# Altium PCB SW 12.PcbDoc
Units mil, origin at the board's own origin, x right, y up, seen from the top; angles counter-clockwise.
Board outline 2757.3 x 2760 mil, 2 copper layers (Top Layer, Bottom Layer); 42 components, 18 nets, 106 pads, 850 vias.
Unrouted connection lines stored in the file: 1.
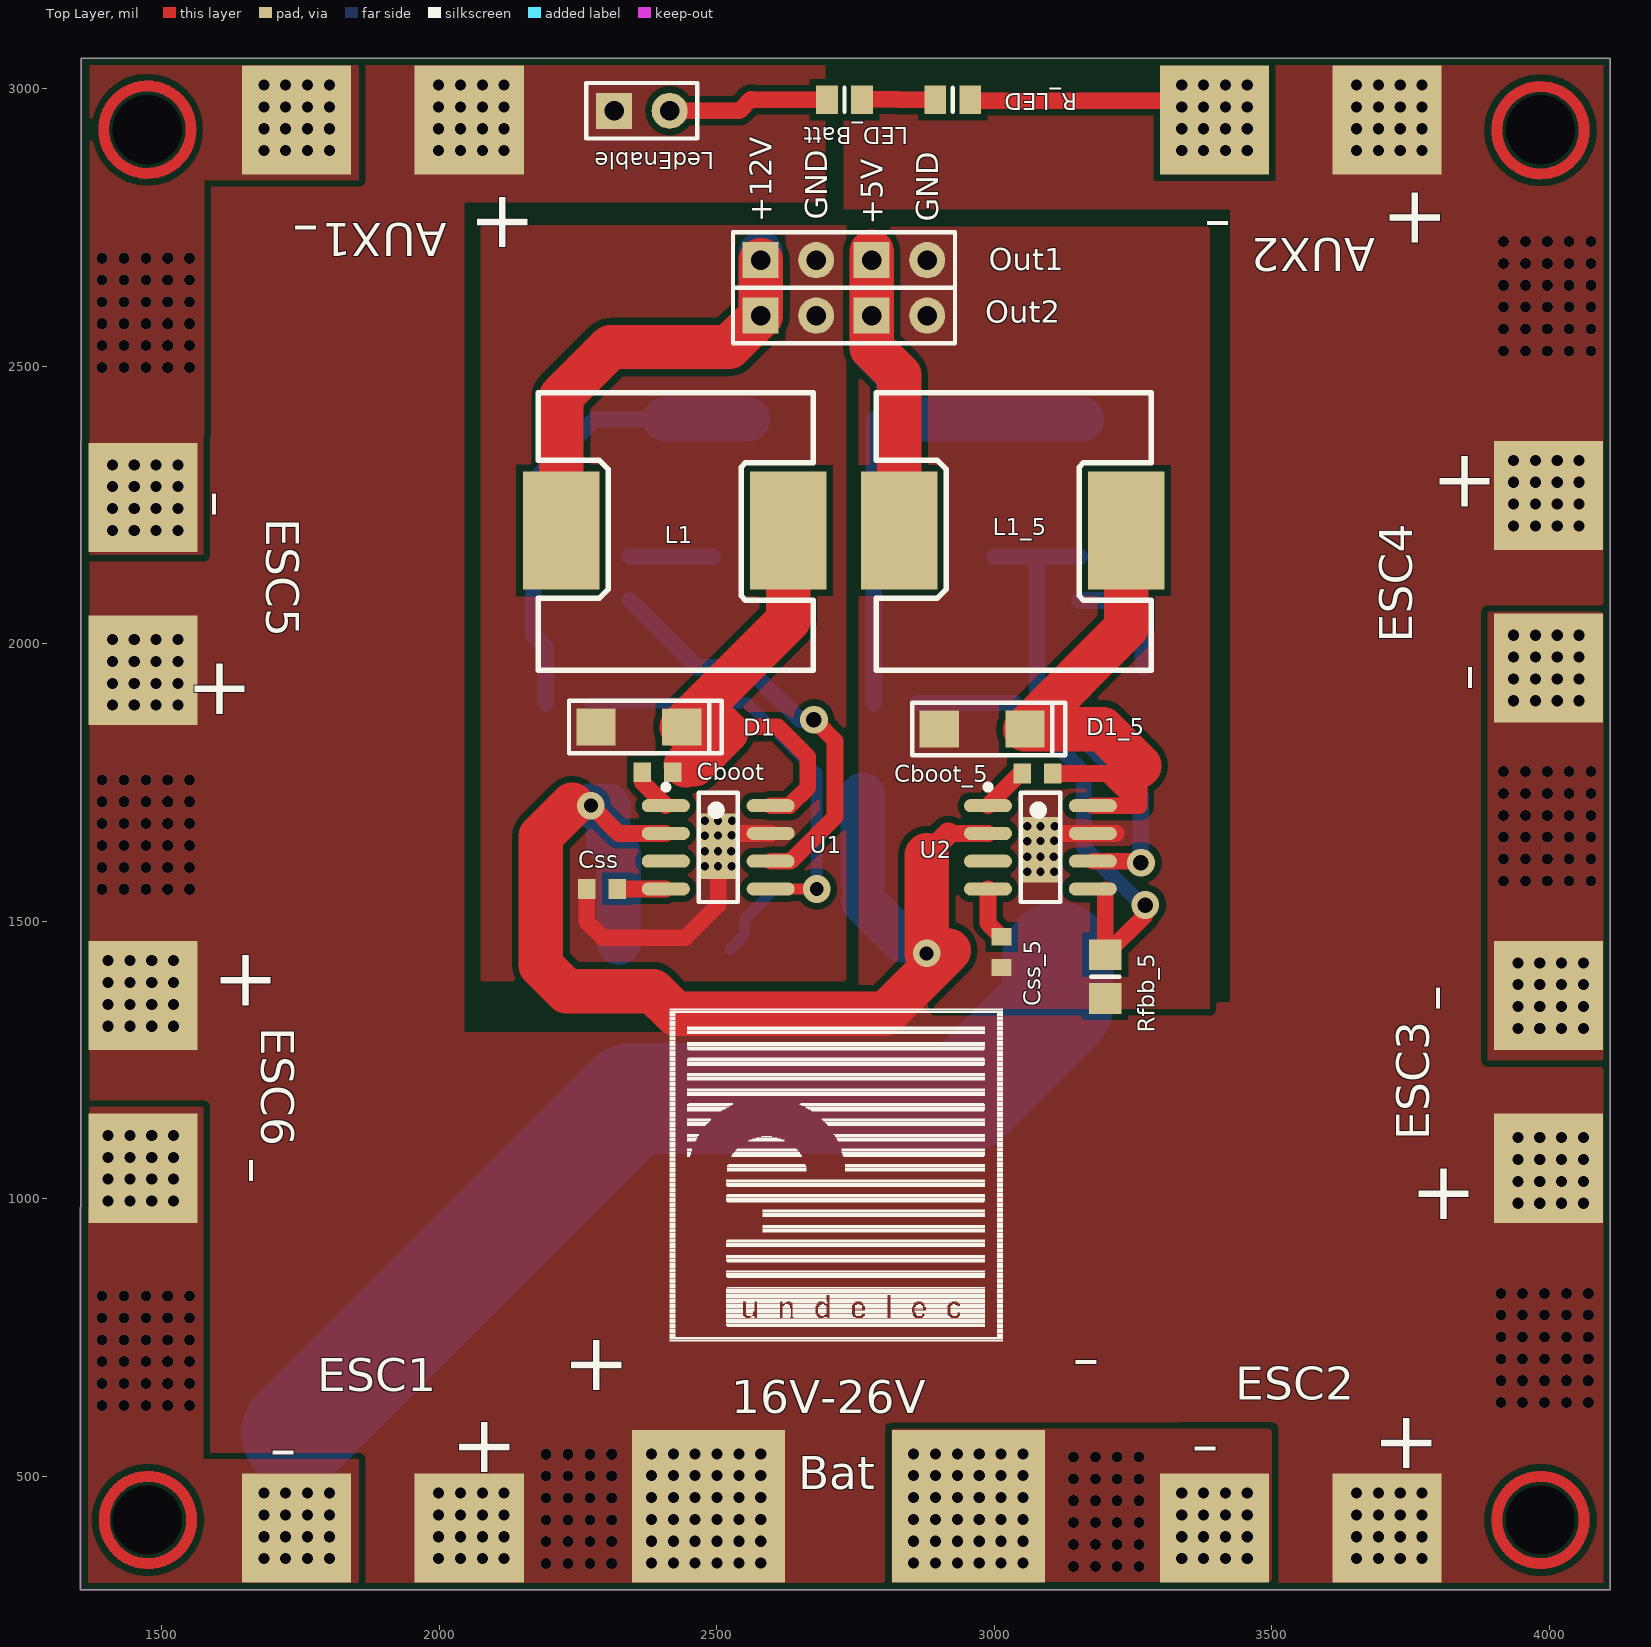
[diagram p0: Top Layer view]
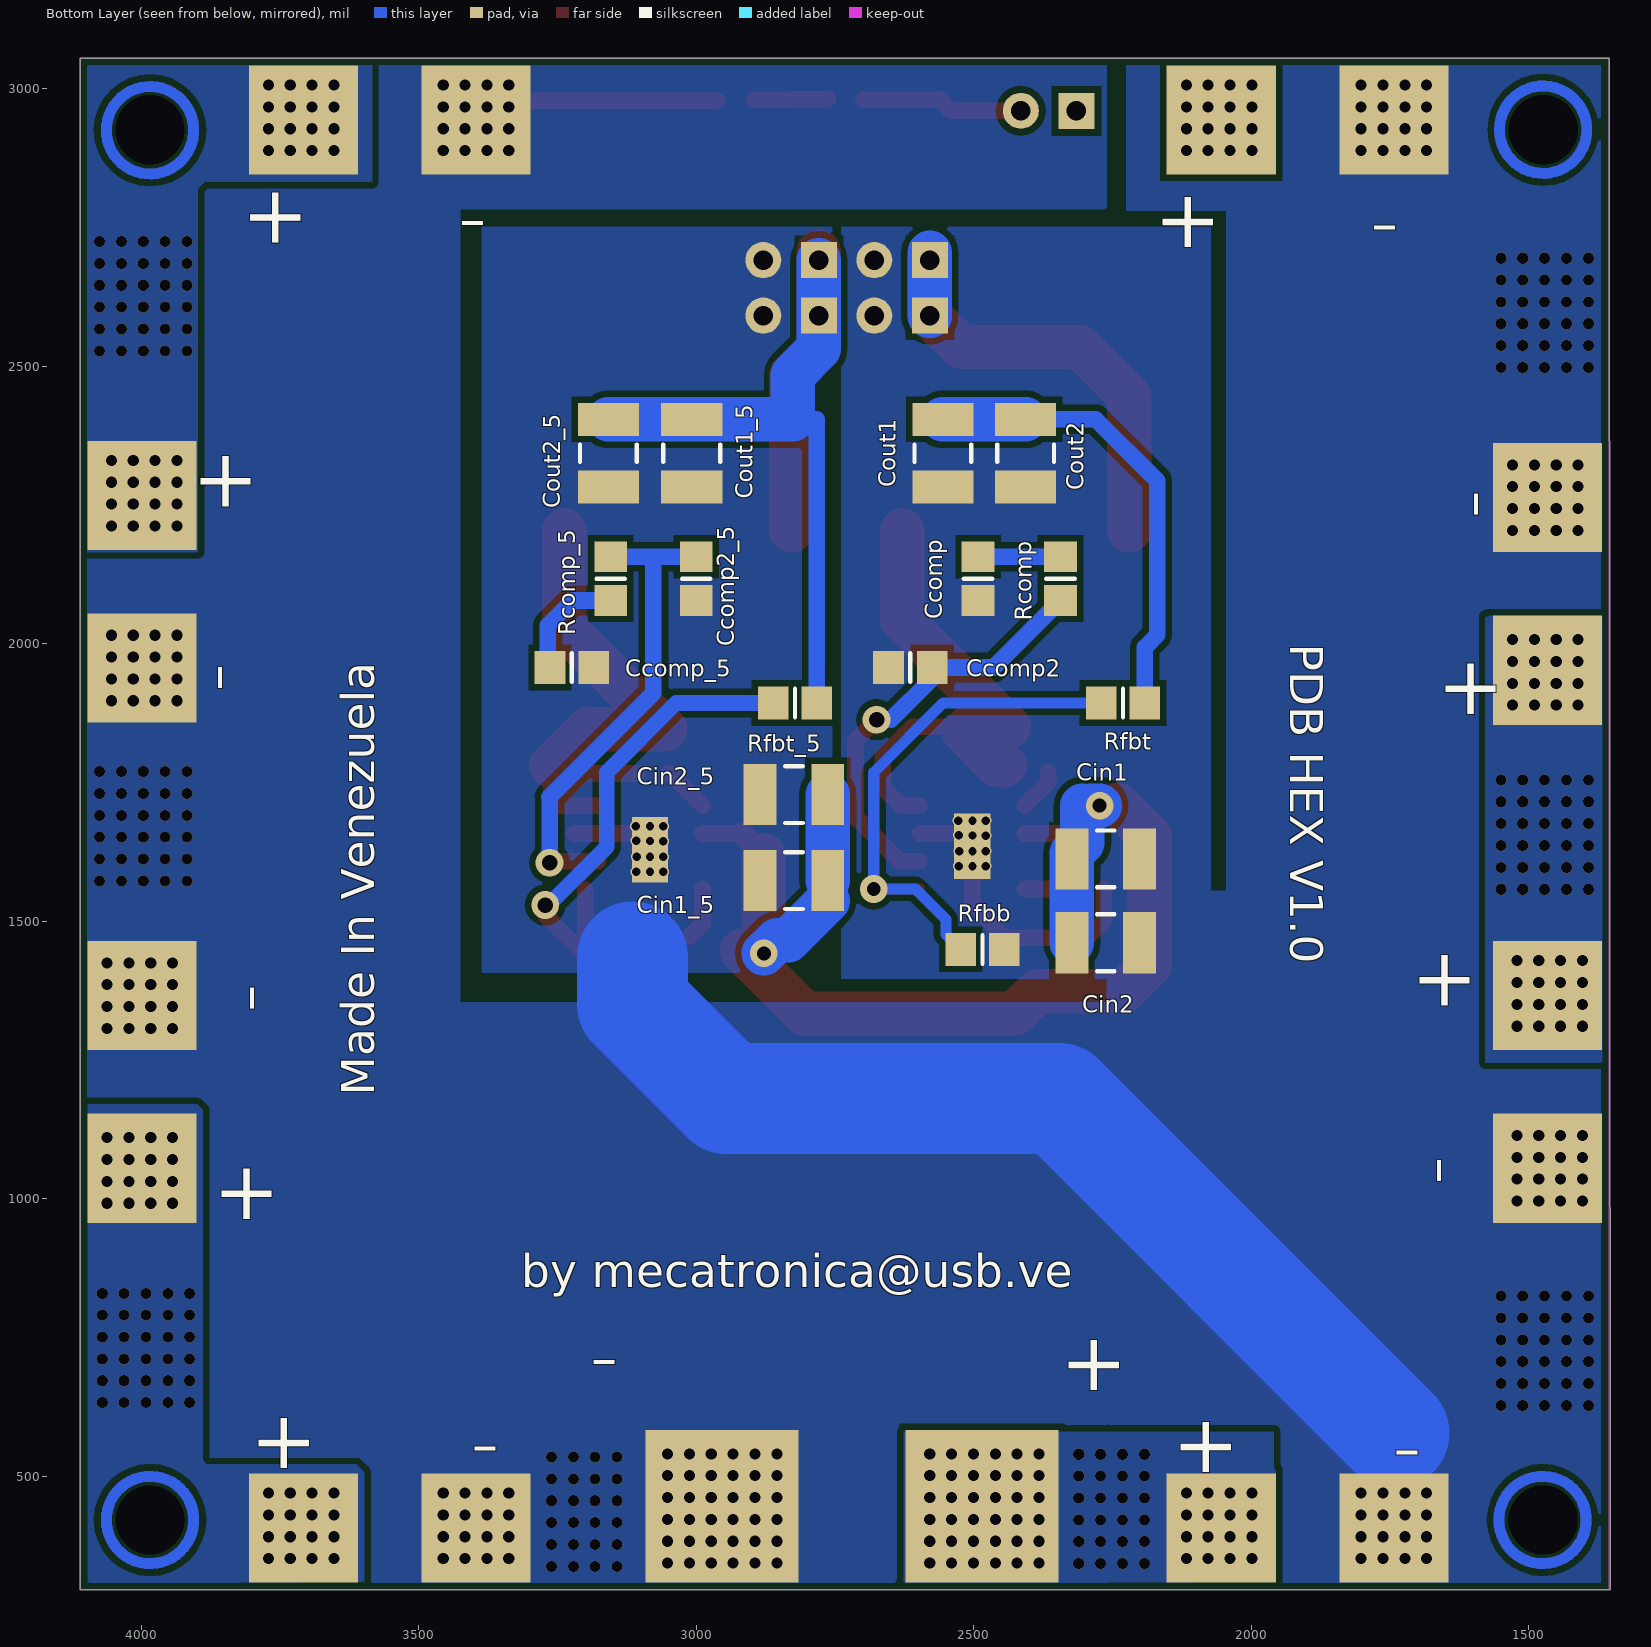
[diagram p1: Bottom Layer view, seen from below]

## Layer stack, top to bottom
Top Solder: solder mask 0.4, Solder Resist, Dk 3.5
Top Layer: signal copper 1.4
Dielectric 1: dielectric 12.6, FR-4, Dk 4.8
Bottom Layer: signal copper 1.4
Bottom Solder: solder mask 0.4, Solder Resist, Dk 3.5

## Board outline
1352.7,295 4110,295 4110,3055 1354.7,3055

## Design rules (kind name [scope] priority, off if disabled: settings)
Clearance Clearance_1 [All] p1: gap=12
Clearance [InComponent('Vin') vs InComponent('Vin')] p2: gap=0
ComponentClearance [All] p1: gap=0 collisioncheckmode=3 verticalgap=0 showdistances=FALSE
PlaneConnect [All] p1: planeconnectstyle=Direct reliefexpansion=20 reliefentries=4 reliefconductorwidth=10 reliefairgap=10
PolygonConnect [All] p1: connectstyle=Direct reliefconductorwidth=10 reliefentries=4 polygonreliefangle="90 Angle" airgapwidth=10
RoutingVias [All] p1: holewidth=25 width=50 viastyle="Through Hole" minholewidth=1 minwidth=1 maxholewidth=28 maxwidth=50
ShortCircuit ShortCircuit_1 [All] p1: allowed=FALSE
ShortCircuit [OnLayer('Keep-Out Layer') vs OnLayer('Multi-Layer')] p2: allowed=TRUE
SolderMaskExpansion [All] p1: expansion=4
Width [All] p1: maxlimit=500 minlimit=10 preferedwidth=20
27 further rules are at their usual default settings.

## Classes and differential pairs
component class SW_S_12: Cboot Ccomp Ccomp2 Cin1 Cin2 Cout1 Cout2 Css D1 Iout L1 Rcomp Rfbb Rfbt U1
component class "SW 12": AUX1 AUX2 Bat BatEnable Batt ESC1 ESC2 ESC3 ESC4 ESC5 ESC6 LED_Batt LedEnable Out1 Out2 R_LED
component class SW_S_5: Cboot_5 Ccomp2_5 Ccomp_5 Cin1_5 Cin2_5 Cout1_5 Cout2_5 Css_5 D1_5 L1_5 Rcomp_5 Rfbb_5 Rfbt_5 U2

## Components (designator, comment, footprint, x,y, rotation, side; value= is the part's Value field where it differs from the comment)
AUX1 "Header 2" "14 AWG Power Footprint" 2156.22,3045.72 r180 top
AUX2 "Header 2" "14 AWG Power Footprint" 3810,3045.72 r180 top
Bat "Header 2" "10 AWG Power Footprint" 2342.84,304 r0 top (schematic designator Batt)
Cboot "C1608X7R1E104K" 1608[0603] 2393,1768 r0 top
Cboot_5 "C1608X7R1E104K" 1608[0603] 3078,1766 r0 top
Ccomp "CC0805KRX7R9BB152" 6-0805_M 2492,2117 r270 bottom
Ccomp2 "CL21C300JBANNNC" 6-0805_M 2614,1957 r0 bottom
Ccomp2_5 "CL21C300JBANNNC" 6-0805_M 3000,2117 r270 bottom
Ccomp_5 "CC0805KRX7R9BB152" 6-0805_M 3224,1957 r180 bottom
Cin1 "GRM32ER71H475KA88L" C1210_M 2262,1612 r180 bottom
Cin1_5 "GRM32ER71H475KA88L" C1210_M 2824,1573 r0 bottom
Cin2 "GRM32ER71H475KA88L" C1210_M 2262,1461 r180 bottom
Cin2_5 "GRM32ER71H475KA88L" C1210_M 2824,1728 r0 bottom
Cout1 "GRM32ER61E226KE15L" C1210_M 2555.5,2343 r270 bottom
Cout1_5 "GRM32ER61E226KE15L" C1210_M 3008,2343 r270 bottom
Cout2 "GRM32ER61E226KE15L" C1210_M 2406.5,2343 r270 bottom
Cout2_5 "GRM32ER61E226KE15L" C1210_M 3158,2343 r270 bottom
Css "GRM188R71E822KA01D" 1608[0603] 2293,1558 r180 top
Css_5 "GRM188R71E822KA01D" 1608[0603] 3013,1444 r270 top
D1 "B340A-13-F" "SMA Diode Package" 2359.5,1850 r180 top
D1_5 "B340A-13-F" "SMA Diode Package" 2978,1846 r180 top
ESC1 "Header 2" "14 AWG Power Footprint" 2156.22,509 r180 top
ESC2 "Header 2" "14 AWG Power Footprint" 3810,509 r180 top
ESC3 "Header 2" "14 AWG Power Footprint" 4100.86,952.4 r90 top
ESC4 "Header 2" "14 AWG Power Footprint" 3896.14,2369.43 r270 top
ESC5 "Header 2" "14 AWG Power Footprint" 1568.42,1849.68 r90 top
ESC6 "Header 2" "14 AWG Power Footprint" 1363.69,1468.15 r270 top
L1 "SRR1260-150M" SRR1260 2426,2204 r180 top
L1_5 "SRR1260-150M" SRR1260 3035,2204 r180 top
LED_Batt "LED" 6-0805_L 2730,2980 r0 top
LedEnable "Header 2" HDR1X2 2315,2960 r0 top (schematic designator BatEnable)
Out1 "Header 4" HDR1X4 2579,2691 r0 top
Out2 "Header 4" HDR1X4 2579,2591 r0 top
R_LED "Res" 6-0805_L 2925,2980 r180 top
Rcomp "CRCW080538K3FKEA" 6-0805_M 2343.5,2117 r90 bottom
Rcomp_5 "CRCW080538K3FKEA" 6-0805_M 3154,2117 r270 bottom
Rfbb "CRCW0805732RFKEA" 6-0805_M 2484,1449 r180 bottom
Rfbb_5 "CRCW0805732RFKEA" 6-0805_M 3200,1400 r270 top
Rfbt "CRCW080510K2FKEA" 6-0805_M 2231,1893 r0 bottom
Rfbt_5 "CRCW080510K2FKEA" 6-0805_M 2822,1893 r0 bottom
U1 "TPS54331DDAR" TI-D8_N 2502.5,1633 r0 top
U2 "TPS54331DDAR" TI-D8_N 3083,1633 r0 top

## Footprints (in the part's own frame and the unit in brackets; to place one, negate y for a bottom-side part, rotate by r counter-clockwise, add the part's x,y. Pads: shape width x height; smd on the part's side, far side on the other; paste and mask are expansions set on the pad)
6-0805_L [mm] "Chip Resistor, Body 2.0x1.2mm, IPC High Density"
  rect 1x1.3 smd: 1(-0.8,0) 2(0.8,0)
  silkscreen extent 0,-0.55 0,0.55, body extent -1.07,-0.7 1.07,0.7, height 0.7
6-0805_M [mm] "Chip Resistor, Body 2.0x1.2mm, IPC Low Density"
  rect 1.4x1.5 smd: 1(-1,0) 2(1,0)
  silkscreen extent 0,-0.65 0,0.65, body extent -1.07,-0.7 1.07,0.7, height 0.7
"10 AWG Power Footprint" [mm] "10 AWG Power Footprint"
  rect 7x7 all layers, no hole: 1(3.6,3.6) 2(15.5,3.6)
"14 AWG Power Footprint" [mm] "10 AWG Power Footprint"
  rect 5x5 all layers, no hole: 1(2.6,2.6) 2(10.5,2.6)
1608[0603] [mm] "Chip Capacitor, Body 1.6x0.8mm, IPC High Density"
  rect 0.8x0.9 smd: 1(-0.7,0) 2(0.7,0)
  body extent -0.87,-0.48 0.87,0.48, height 1.3
C1210_M [mm] "Chip Capacitor, Body 3.2x2.5mm, IPC Low Density"
  rect 1.5x2.8 smd: 1(-1.55,0) 2(1.55,0)
  silkscreen extent -0.4,-1.3 0.4,1.3, body extent -1.7,-1.35 1.7,1.35, height 1.5
HDR1X2 [mil] "Connector; Header; 2 Position"
  rect 65x65 hole 35: 1(0,0)
  round 65 hole 35: 2(100,0)
  silkscreen extent -50,-50 150,50
HDR1X4 [mil] "Connector; Header; 4 Position"
  rect 65x65 hole 35: 1(0,0) 3(200,0)
  round 65 hole 35: 2(100,0) 4(300,0)
  silkscreen extent -50,-50 350,50
"SMA Diode Package" [mm]
  rect 1.8x1.7 smd: 1(-1.965,0) 2(1.965,0)
  silkscreen extent -3.8,-1.2 3.2,1.2, body extent -2.6,-1.2 2.6,1.2, height 2.44
SRR1260 [mm]
  rect 3.5x5.4 smd paste+0: 1(-5.15,0)
  rect 3.5x5.4 smd: 2(5.25,0)
  silkscreen extent -6.3,-6.3 6.3,6.4, body extent -6.3,-6.3 6.3,6.4, height 6.15
TI-D8_N [mm] "SOIC, 8-Leads, Body 4.9x3.9mm, Pitch 1.27mm, IPC Medium Density"
  oval 2.2x0.6 smd: 1(-2.4,1.905) 2(-2.4,0.635) 3(-2.4,-0.635) 4(-2.4,-1.905) 5(2.4,-1.905) 6(2.4,-0.635) 7(2.4,0.635) 8(2.4,1.905)
  silkscreen extent -2.52,-2.5 0.9,2.88, body extent -2,-2.5 2,2.5, height 1.75

## Part data
AUX1 AUX2 Bat ESC1 ESC2 ESC3 ESC4 ESC5 ESC6 LedEnable: "Header, 2-Pin"
Ccomp Ccomp_5: "CC0805KRX7R9BB15"
Cin1 Cin1_5 Cin2 Cin2_5: "GRM32ER71H475KA8"
Cout1 Cout1_5 Cout2 Cout2_5: "GRM32ER61E226KE1"
Css Css_5: "GRM188R71E822KA0"
LED_Batt: library part LED2, "Typical RED, GREEN, YELLOW, AMBER GaAs LED"
Out1 Out2: "Header, 4-Pin"
R_LED: library part Res3, "Resistor"

## Free pads (board coordinates)
  round 78.74 hole 125: 0(1474,421) 0(1474,2926) 0(3984,421) 0(3984,2926)
  rect 65x118.11 all layers, no hole: ""(2502.5,1635) ""(3083,1629)

## Via types
v1: diameter 20, hole 20, Top Layer to Bottom Layer, 820 vias
v2: diameter 20, hole 15, Top Layer to Bottom Layer, 24 vias
v3: diameter 50, hole 25, Top Layer to Bottom Layer, 3 vias
v4: diameter 50, hole 28, Top Layer to Bottom Layer, 3 vias

## Nets (pads, with @x,y where several pads share a name; then routed paths per layer and width w, separated by ;. In a path a pad name is that pad's centre, name@x,y a point inside that pad or via, vN(x,y) a via of type N, cw(c..) or ccw(c..) an arc to the next point about the centre after c; other vN are vias at no path point)
+5V: Cout1_5.1 Cout2_5.1 L1_5.2 Out1.3 Out2.3 Rfbt_5.1 | length 1871.9
  Top Layer w80: Out2.3 Out1.3@2779,2706 ; Out1.3 2779,2533 2828.31,2483.69 L1_5.2
  Bottom Layer w30: Rfbt_5.1 2782.63,2404.02
  Bottom Layer w80: Out2.3 Out1.3 2779,2531 2825.98,2484.02 2825.98,2404.02 Cout1_5.1 Cout2_5.1
+12V: Cout1.1 Cout2.1 L1.2 Out1.1 Out2.1 Rfbt.1 | length 1716.2
  Top Layer w80: L1.2 2219.31,2445.31 2308.5,2534.5 2522.5,2534.5 Out2.1 Out1.1
  Bottom Layer w30: Rfbt.1 2191.63,1993.37 2169,2016 2169,2293 2280.02,2404.02 Cout2.1
  Bottom Layer w80: Cout2.1 Cout1.1 ; Out2.1 Out1.1 Out1.1@2579,2704
GND: AUX1.2 AUX2.2 Bat.2 Ccomp2.2 Ccomp2_5.2 Ccomp.2 Ccomp_5.2 Cin1.2 Cin1_5.2 Cin2.2 Cin2_5.2 Cout1.2 Cout1_5.2 Cout2.2 Cout2_5.2 Css.2 Css_5.2 D1.2 D1_5.2 ESC1.2 ESC2.2 ESC3.2 ESC4.2 ESC5.2 ESC6.2 Out1.2 Out1.4 Out2.2 Out2.4 pad. R_LED.1 Rfbb.2 Rfbb_5.2 U1.7 U2.7 | length 2833.5
  Top Layer w30: Css.2 2265.44,1499.56 2295,1470 2443,1470 2502.5,1529.5 2502.5,1635 pad.@2502.5,1653.33 ; pad.@2525.5,1658 U1.7 ; R_LED.1@2962.5,2978 AUX2.2@3381.25,2978 ; pad.@3109,1658 U2.7 U2.7@3219.08,1658
  Bottom Layer w200: 1742.83,577.83 2345,1180 2945,1180 3115,1350 3115,1435
  other v1: 3142.52,337.52 3142.52,337.52 3181.89,337.52 3181.89,337.52 3221.26,337.52 3221.26,337.52 3260.63,337.52 3260.63,337.52 2854.65,343.37 2894.02,343.37 2933.39,343.37 2972.76,343.37 3012.13,343.37 3051.5,343.37 1683.78,351.52 1723.15,351.52 1762.52,351.52 1801.89,351.52 3337.56,351.52 3376.93,351.52 3416.3,351.52 3455.67,351.52 3142.52,376.89 3142.52,376.89 3181.89,376.89 3181.89,376.89 3221.26,376.89 3221.26,376.89 3260.63,376.89 3260.63,376.89 2854.65,382.74 2894.02,382.74 2933.39,382.74 2972.76,382.74 3012.13,382.74 3051.5,382.74 1683.78,390.89 1723.15,390.89 1762.52,390.89 1801.89,390.89 3337.56,390.89 3376.93,390.89 3416.3,390.89 3455.67,390.89 3142.52,416.26 3142.52,416.26 3181.89,416.26 3181.89,416.26 3221.26,416.26 3221.26,416.26 3260.63,416.26 3260.63,416.26 2854.65,422.11 2894.02,422.11 2933.39,422.11 2972.76,422.11 3012.13,422.11 3051.5,422.11 1683.78,430.26 1723.15,430.26 1762.52,430.26 1801.89,430.26 3337.56,430.26 3376.93,430.26 3416.3,430.26 3455.67,430.26 3142.52,455.63 3142.52,455.63 3181.89,455.63 3181.89,455.63 3221.26,455.63 3221.26,455.63 3260.63,455.63 3260.63,455.63 2854.65,461.48 2894.02,461.48 2933.39,461.48 2972.76,461.48 3012.13,461.48 3051.5,461.48 1683.78,469.63 1723.15,469.63 1762.52,469.63 1801.89,469.63 3337.56,469.63 3376.93,469.63 3416.3,469.63 3455.67,469.63 3142.52,495 3142.52,495 3181.89,495 3181.89,495 3221.26,495 3221.26,495 3260.63,495 3260.63,495 2854.65,500.85 2894.02,500.85 2933.39,500.85 2972.76,500.85 3012.13,500.85 3051.5,500.85 3142.52,534.37 3142.52,534.37 3181.89,534.37 3181.89,534.37 3221.26,534.37 3221.26,534.37 3260.63,534.37 3260.63,534.37 2854.65,540.22 2894.02,540.22 2933.39,540.22 2972.76,540.22 3012.13,540.22 3051.5,540.22 1392.52,627.52 1392.52,627.52 1431.89,627.52 1431.89,627.52 1471.26,627.52 1471.26,627.52 1510.63,627.52 1510.63,627.52 1550,627.52 1550,627.52 1392.52,666.89 1392.52,666.89 1431.89,666.89 1431.89,666.89 1471.26,666.89 1471.26,666.89 1510.63,666.89 1510.63,666.89 1550,666.89 1550,666.89 1392.52,706.26 1392.52,706.26 1431.89,706.26 1431.89,706.26 1471.26,706.26 1471.26,706.26 1510.63,706.26 1510.63,706.26 1550,706.26 1550,706.26 1392.52,745.63 1392.52,745.63 1431.89,745.63 1431.89,745.63 1471.26,745.63 1471.26,745.63 1510.63,745.63 1510.63,745.63 1550,745.63 1550,745.63 1392.52,785 1392.52,785 1431.89,785 1431.89,785 1471.26,785 1471.26,785 1510.63,785 1510.63,785 1550,785 1550,785 1392.52,824.37 1392.52,824.37 1431.89,824.37 1431.89,824.37 1471.26,824.37 1471.26,824.37 1510.63,824.37 1510.63,824.37 1550,824.37 1550,824.37 1403.06,995.71 1442.43,995.71 1481.8,995.71 1521.17,995.71 1403.06,1035.08 1442.43,1035.08 1481.8,1035.08 1521.17,1035.08 1403.06,1074.45 1442.43,1074.45 1481.8,1074.45 1521.17,1074.45 1403.06,1113.82 1442.43,1113.82 1481.8,1113.82 1521.17,1113.82 3943.38,1306.73 3982.75,1306.73 4022.12,1306.73 4061.49,1306.73 3943.38,1346.1 3982.75,1346.1 4022.12,1346.1 4061.49,1346.1 3943.38,1385.47 3982.75,1385.47 4022.12,1385.47 4061.49,1385.47 3943.38,1424.84 3982.75,1424.84 4022.12,1424.84 4061.49,1424.84 3917.52,1572.52 3917.52,1572.52 3956.89,1572.52 3956.89,1572.52 3996.26,1572.52 3996.26,1572.52 4035.63,1572.52 4035.63,1572.52 4075,1572.52 4075,1572.52 3917.52,1611.89 3917.52,1611.89 3956.89,1611.89 3956.89,1611.89 3996.26,1611.89 3996.26,1611.89 4035.63,1611.89 4035.63,1611.89 4075,1611.89 4075,1611.89 3917.52,1651.26 3917.52,1651.26 3956.89,1651.26 3956.89,1651.26 3996.26,1651.26 3996.26,1651.26 4035.63,1651.26 4035.63,1651.26 4075,1651.26 4075,1651.26 3917.52,1690.63 3917.52,1690.63 3956.89,1690.63 3956.89,1690.63 3996.26,1690.63 3996.26,1690.63 4035.63,1690.63 4035.63,1690.63 4075,1690.63 4075,1690.63 3917.52,1730 3917.52,1730 3956.89,1730 3956.89,1730 3996.26,1730 3996.26,1730 4035.63,1730 4035.63,1730 4075,1730 4075,1730 3917.52,1769.37 3917.52,1769.37 3956.89,1769.37 3956.89,1769.37 3996.26,1769.37 3996.26,1769.37 4035.63,1769.37 4035.63,1769.37 4075,1769.37 4075,1769.37 3935.51,1896.99 3974.88,1896.99 4014.25,1896.99 4053.62,1896.99 3935.51,1936.36 3974.88,1936.36 4014.25,1936.36 4053.62,1936.36 3935.51,1975.73 3974.88,1975.73 4014.25,1975.73 4053.62,1975.73 3935.51,2015.1 3974.88,2015.1 4014.25,2015.1 4053.62,2015.1 1410.94,2204.02 1450.31,2204.02 1489.68,2204.02 1529.05,2204.02 1410.94,2243.39 1450.31,2243.39 1489.68,2243.39 1529.05,2243.39 1410.94,2282.76 1450.31,2282.76 1489.68,2282.76 1529.05,2282.76 1410.94,2322.13 1450.31,2322.13 1489.68,2322.13 1529.05,2322.13 1392.52,2497.52 1392.52,2497.52 1431.89,2497.52 1431.89,2497.52 1471.26,2497.52 1471.26,2497.52 1510.63,2497.52 1510.63,2497.52 1550,2497.52 1550,2497.52 1392.52,2536.89 1392.52,2536.89 1431.89,2536.89 1431.89,2536.89 1471.26,2536.89 1471.26,2536.89 1510.63,2536.89 1510.63,2536.89 1550,2536.89 1550,2536.89 1392.52,2576.26 1392.52,2576.26 1431.89,2576.26 1431.89,2576.26 1471.26,2576.26 1471.26,2576.26 1510.63,2576.26 1510.63,2576.26 1550,2576.26 1550,2576.26 1392.52,2615.63 1392.52,2615.63 1431.89,2615.63 1431.89,2615.63 1471.26,2615.63 1471.26,2615.63 1510.63,2615.63 1510.63,2615.63 1550,2615.63 1550,2615.63 1392.52,2655 1392.52,2655 1431.89,2655 1431.89,2655 1471.26,2655 1471.26,2655 1510.63,2655 1510.63,2655 1550,2655 1550,2655 1392.52,2694.37 1392.52,2694.37 1431.89,2694.37 1431.89,2694.37 1471.26,2694.37 1471.26,2694.37 1510.63,2694.37 1510.63,2694.37 1550,2694.37 1550,2694.37 1683.78,2888.24 1723.15,2888.24 1762.52,2888.24 1801.89,2888.24 3337.56,2888.24 3376.93,2888.24 3416.3,2888.24 3455.67,2888.24 1683.78,2927.61 1723.15,2927.61 1762.52,2927.61 1801.89,2927.61 3337.56,2927.61 3376.93,2927.61 3416.3,2927.61 3455.67,2927.61 1683.78,2966.98 1723.15,2966.98 1762.52,2966.98 1801.89,2966.98 3337.56,2966.98 3376.93,2966.98 3416.3,2966.98 3455.67,2966.98 1683.78,3006.35 1723.15,3006.35 1762.52,3006.35 1801.89,3006.35 3337.56,3006.35 3376.93,3006.35 3416.3,3006.35 3455.67,3006.35
  other v2: 3059,1589 3083,1589 3108,1589 2478,1599 2502,1599 2527,1599 3059,1616 3083,1616 3107,1616 2478,1626 2502,1626 2526,1626 3059,1644 3083,1644.33 3108,1645 2478,1654 2502,1654.33 2527,1655 3059,1671 3083,1671 3109,1671 2478,1681 2502,1681 2528,1681
NetBatEnable_2: LED_Batt.1 LedEnable.2 | length 291.2
  Top Layer w30: LedEnable.2 2540.5,2960 2561.5,2981 ; 2562.5,2980 LED_Batt.1
NetCboot_1: Cboot.1 U1.1 | length 77.6
  Top Layer w30: Cboot.1 2365.44,1750.57 U1.1
NetCboot_5_1: Cboot_5.1 U2.1 | length 86
  Top Layer w30: U2.1 3046.51,1766 Cboot_5.1
NetCcomp2_1: Ccomp2.1 Rcomp.1 U1.6 | length 772
  Top Layer w30: U1.6 2633.37,1608 2713,1687.63 2713,1825 v4(2675,1863)
  Bottom Layer w30: Rcomp.1 2464.13,1957 Ccomp2.1 2574.63,1937.37 2649,1863 v4(2675,1863)
NetCcomp2_5_1: Ccomp2_5.1 Rcomp_5.1 U2.6 | length 865.9
  Top Layer w30: U2.6 v4@3256,1608
  Bottom Layer w30: Ccomp2_5.1 3087,2156.37 ; Rcomp_5.1 3087,2156.37 ; v4(3264,1605) 3264,1723 3264.5,1723.5 3077,1911 3077,2146.37 3087,2156.37
NetCcomp_1: Ccomp.1 Rcomp.2 | length 148.5
  Bottom Layer w30: Rcomp.2 Ccomp.1
NetCcomp_5_1: Ccomp_5.1 Rcomp_5.2 | length 207.6
  Bottom Layer w30: Rcomp_5.2 3222.37,2077.63 3267.37,2032.63 Ccomp_5.1@3267.37,1957
NetCss_1: Css.1 U1.4 | length 87.5
  Top Layer w30: Css.1 U1.4
NetCss_5_1: Css_5.1 U2.4 | length 96.6
  Top Layer w30: U2.4 2988.51,1496.05 Css_5.1
NetLED_Batt_2: LED_Batt.2 R_LED.2 | length 132.9
  Top Layer w30: LED_Batt.2@2762.5,2981 2826.5,2981 2827.5,2980 R_LED.2 R_LED.2@2895,2980
NetRfbb_1: Rfbb.1 Rfbt.2 U1.5 | length 972.2
  Top Layer w20: U1.5 v3(2680,1558)
  Bottom Layer w20: Rfbt.2 2555,1893 2680,1768 v3(2680,1558) 2605,1558 2550,1503 2550,1475.63 Rfbb.1
NetRfbb_5_1: Rfbb_5.1 Rfbt_5.2 U2.5 | length 876.2
  Top Layer w28: v4@3272,1519 v4(3272,1529)
  Top Layer w30: U2.5@3200,1556 Rfbb_5.1 3272,1511.37 v4@3272,1519
  Bottom Layer w28: Rfbt_5.2 3036,1893 3161,1768 3161,1633.7 3265.7,1529 v4(3272,1529)
PH_5: Cboot_5.2 D1_5.1 L1_5.1 U2.8 | length 1001.5
  Top Layer w30: Cboot_5.2 3203,1766 3261,1708 ; U2.8 3261,1708 ; 3261,1780 3261,1708
  Top Layer w80: L1_5.1 3237.76,2028.39 D1_5.1 3195,1846 3261,1780
PH_12: Cboot.2 D1.1 L1.1 U1.8 | length 929.3
  Top Layer w30: D1.1 2508,1850 2610,1850 2664,1796 2664,1741 2631,1708 U1.8
  Top Layer w80: D1.1 2628.76,2041.89 L1.1 ; 2444,1781 2446,1783 2459,1783 2517,1841 2508,1850
VBATT: AUX1.1 AUX2.1 Bat.1 Cin1.1 Cin1_5.1 Cin2.1 Cin2_5.1 ESC1.1 ESC2.1 ESC3.1 ESC4.1 ESC5.1 ESC6.1 LedEnable.1 U1.2 U2.2 | length 2170.4
  Top Layer w30: v3(2273,1708) 2323,1658 U1.2 ; 2917,1658 U2.2
  Top Layer w40: 2878,1619 2917,1658
  Top Layer w80: 2239.5,1709.5 2183,1653 2183,1420.27 2229.27,1374 2385,1374 2426,1333 2569,1333 2804,1333 2918,1447 ; v3(2878,1442) 2878,1619
  Bottom Layer w80: v3(2273,1708) v3@2288.76,1708 ; 2304,1708 2304,1641.02 2323.02,1622 Cin1.1 Cin2.1 ; Cin1_5.1@2762.98,1536.86 2833.96,1465.88 2854.12,1465.88 v3(2878,1442) ; Cin1_5.1 Cin2_5.1
  other v1: 2192.52,342.52 2192.52,342.52 2231.89,342.52 2231.89,342.52 2271.26,342.52 2271.26,342.52 2310.63,342.52 2310.63,342.52 2382.21,343.37 2382.21,343.37 2421.58,343.37 2421.58,343.37 2460.95,343.37 2460.95,343.37 2500.32,343.37 2500.32,343.37 2539.69,343.37 2539.69,343.37 2579.06,343.37 2579.06,343.37 1998.74,351.52 2038.11,351.52 2077.48,351.52 2116.85,351.52 3652.52,351.52 3691.89,351.52 3731.26,351.52 3770.63,351.52 2192.52,381.89 2192.52,381.89 2231.89,381.89 2231.89,381.89 2271.26,381.89 2271.26,381.89 2310.63,381.89 2310.63,381.89 2382.21,382.74 2382.21,382.74 2421.58,382.74 2421.58,382.74 2460.95,382.74 2460.95,382.74 2500.32,382.74 2500.32,382.74 2539.69,382.74 2539.69,382.74 2579.06,382.74 2579.06,382.74 1998.74,390.89 2038.11,390.89 2077.48,390.89 2116.85,390.89 3652.52,390.89 3691.89,390.89 3731.26,390.89 3770.63,390.89 2192.52,421.26 2192.52,421.26 2231.89,421.26 2231.89,421.26 2271.26,421.26 2271.26,421.26 2310.63,421.26 2310.63,421.26 2382.21,422.11 2382.21,422.11 2421.58,422.11 2421.58,422.11 2460.95,422.11 2460.95,422.11 2500.32,422.11 2500.32,422.11 2539.69,422.11 2539.69,422.11 2579.06,422.11 2579.06,422.11 1998.74,430.26 2038.11,430.26 2077.48,430.26 2116.85,430.26 3652.52,430.26 3691.89,430.26 3731.26,430.26 3770.63,430.26 2192.52,460.63 2192.52,460.63 2231.89,460.63 2231.89,460.63 2271.26,460.63 2271.26,460.63 2310.63,460.63 2310.63,460.63 2382.21,461.48 2382.21,461.48 2421.58,461.48 2421.58,461.48 2460.95,461.48 2460.95,461.48 2500.32,461.48 2500.32,461.48 2539.69,461.48 2539.69,461.48 2579.06,461.48 2579.06,461.48 1998.74,469.63 2038.11,469.63 2077.48,469.63 2116.85,469.63 3652.52,469.63 3691.89,469.63 3731.26,469.63 3770.63,469.63 2192.52,500 2192.52,500 2231.89,500 2231.89,500 2271.26,500 2271.26,500 2310.63,500 2310.63,500 2382.21,500.85 2382.21,500.85 2421.58,500.85 2421.58,500.85 2460.95,500.85 2460.95,500.85 2500.32,500.85 2500.32,500.85 2539.69,500.85 2539.69,500.85 2579.06,500.85 2579.06,500.85 2192.52,539.37 2192.52,539.37 2231.89,539.37 2231.89,539.37 2271.26,539.37 2271.26,539.37 2310.63,539.37 2310.63,539.37 2382.21,540.22 2382.21,540.22 2421.58,540.22 2421.58,540.22 2460.95,540.22 2460.95,540.22 2500.32,540.22 2500.32,540.22 2539.69,540.22 2539.69,540.22 2579.06,540.22 2579.06,540.22 3912.52,632.52 3912.52,632.52 3951.89,632.52 3951.89,632.52 3991.26,632.52 3991.26,632.52 4030.63,632.52 4030.63,632.52 4070,632.52 4070,632.52 3912.52,671.89 3912.52,671.89 3951.89,671.89 3951.89,671.89 3991.26,671.89 3991.26,671.89 4030.63,671.89 4030.63,671.89 4070,671.89 4070,671.89 3912.52,711.26 3912.52,711.26 3951.89,711.26 3951.89,711.26 3991.26,711.26 3991.26,711.26 4030.63,711.26 4030.63,711.26 4070,711.26 4070,711.26 3912.52,750.63 3912.52,750.63 3951.89,750.63 3951.89,750.63 3991.26,750.63 3991.26,750.63 4030.63,750.63 4030.63,750.63 4070,750.63 4070,750.63 3912.52,790 3912.52,790 3951.89,790 3951.89,790 3991.26,790 3991.26,790 4030.63,790 4030.63,790 4070,790 4070,790 3912.52,829.37 3912.52,829.37 3951.89,829.37 3951.89,829.37 3991.26,829.37 3991.26,829.37 4030.63,829.37 4030.63,829.37 4070,829.37 4070,829.37 3943.38,991.77 3982.75,991.77 4022.12,991.77 4061.49,991.77 3943.38,1031.14 3982.75,1031.14 4022.12,1031.14 4061.49,1031.14 3943.38,1070.51 3982.75,1070.51 4022.12,1070.51 4061.49,1070.51 3943.38,1109.88 3982.75,1109.88 4022.12,1109.88 4061.49,1109.88 1403.06,1310.67 1442.43,1310.67 1481.8,1310.67 1521.17,1310.67 1403.06,1350.04 1442.43,1350.04 1481.8,1350.04 1521.17,1350.04 1403.06,1389.41 1442.43,1389.41 1481.8,1389.41 1521.17,1389.41 1403.06,1428.78 1442.43,1428.78 1481.8,1428.78 1521.17,1428.78 1392.52,1557.52 1392.52,1557.52 1431.89,1557.52 1431.89,1557.52 1471.26,1557.52 1471.26,1557.52 1510.63,1557.52 1510.63,1557.52 1550,1557.52 1550,1557.52 1392.52,1596.89 1392.52,1596.89 1431.89,1596.89 1431.89,1596.89 1471.26,1596.89 1471.26,1596.89 1510.63,1596.89 1510.63,1596.89 1550,1596.89 1550,1596.89 1392.52,1636.26 1392.52,1636.26 1431.89,1636.26 1431.89,1636.26 1471.26,1636.26 1471.26,1636.26 1510.63,1636.26 1510.63,1636.26 1550,1636.26 1550,1636.26 1392.52,1675.63 1392.52,1675.63 1431.89,1675.63 1431.89,1675.63 1471.26,1675.63 1471.26,1675.63 1510.63,1675.63 1510.63,1675.63 1550,1675.63 1550,1675.63 1392.52,1715 1392.52,1715 1431.89,1715 1431.89,1715 1471.26,1715 1471.26,1715 1510.63,1715 1510.63,1715 1550,1715 1550,1715 1392.52,1754.37 1392.52,1754.37 1431.89,1754.37 1431.89,1754.37 1471.26,1754.37 1471.26,1754.37 1510.63,1754.37 1510.63,1754.37 1550,1754.37 1550,1754.37 1410.94,1889.06 1450.31,1889.06 1489.68,1889.06 1529.05,1889.06 1410.94,1928.43 1450.31,1928.43 1489.68,1928.43 1529.05,1928.43 1410.94,1967.8 1450.31,1967.8 1489.68,1967.8 1529.05,1967.8 1410.94,2007.17 1450.31,2007.17 1489.68,2007.17 1529.05,2007.17 3935.51,2211.95 3974.88,2211.95 4014.25,2211.95 4053.62,2211.95 3935.51,2251.32 3974.88,2251.32 4014.25,2251.32 4053.62,2251.32 3935.51,2290.69 3974.88,2290.69 4014.25,2290.69 4053.62,2290.69 3935.51,2330.06 3974.88,2330.06 4014.25,2330.06 4053.62,2330.06 3917.52,2527.52 3917.52,2527.52 3956.89,2527.52 3956.89,2527.52 3996.26,2527.52 3996.26,2527.52 4035.63,2527.52 4035.63,2527.52 4075,2527.52 4075,2527.52 3917.52,2566.89 3917.52,2566.89 3956.89,2566.89 3956.89,2566.89 3996.26,2566.89 3996.26,2566.89 4035.63,2566.89 4035.63,2566.89 4075,2566.89 4075,2566.89 3917.52,2606.26 3917.52,2606.26 3956.89,2606.26 3956.89,2606.26 3996.26,2606.26 3996.26,2606.26 4035.63,2606.26 4035.63,2606.26 4075,2606.26 4075,2606.26 3917.52,2645.63 3917.52,2645.63 3956.89,2645.63 3956.89,2645.63 3996.26,2645.63 3996.26,2645.63 4035.63,2645.63 4035.63,2645.63 4075,2645.63 4075,2645.63 3917.52,2685 3917.52,2685 3956.89,2685 3956.89,2685 3996.26,2685 3996.26,2685 4035.63,2685 4035.63,2685 4075,2685 4075,2685 3917.52,2724.37 3917.52,2724.37 3956.89,2724.37 3956.89,2724.37 3996.26,2724.37 3996.26,2724.37 4035.63,2724.37 4035.63,2724.37 4075,2724.37 4075,2724.37 1998.74,2888.24 2038.11,2888.24 2077.48,2888.24 2116.85,2888.24 3652.52,2888.24 3691.89,2888.24 3731.26,2888.24 3770.63,2888.24 1998.74,2927.61 2038.11,2927.61 2077.48,2927.61 2116.85,2927.61 3652.52,2927.61 3691.89,2927.61 3731.26,2927.61 3770.63,2927.61 1998.74,2966.98 2038.11,2966.98 2077.48,2966.98 2116.85,2966.98 3652.52,2966.98 3691.89,2966.98 3731.26,2966.98 3770.63,2966.98 1998.74,3006.35 2038.11,3006.35 2077.48,3006.35 2116.85,3006.35 3652.52,3006.35 3691.89,3006.35 3731.26,3006.35 3770.63,3006.35
pads on no net: U1.3 U2.3

## Polygon pours and split planes (outlines as drawn)
GND on Top Layer "GND_P" (solid, remove dead copper, pour order 25): 3877.7,2061.68 3880.35,2059.03 3880.35,1240.35 4090.1,1240.35 4097.26,1233.19 4105,1240.94 4105,2067
GND on Top Layer "GND_P" (solid, remove dead copper, pour order 23): 2802.76,310 2802.76,585 3505,585 3505,310
GND on Top Layer "VBATT_P" (solid, remove dead copper, pour order 21): 1370,1165.19 1576.48,1165.19 1575,1165 1575,530 1855,530 1855,305 1360,305
GND on Top Layer "VBATT_P" (solid, remove dead copper, pour order 19): 1370,2160 1576.48,2160 1576.48,2833.52 1575,2835 1855,2835 1855,3045 1370,3045
GND on Top Layer "gnd mask" (solid, pour order 14): 2756,1342 2756,2751 3388,2751 3388,1342
GND on Top Layer "gnd mask" (solid, pour order 13): 2075,1392 2075,2754 2733,2754 2733,1392
VBATT on Top Layer "VBATT_P" (solid, remove dead copper, pour order 12): 2685,306.04 2685,1354 3425,1354 3425,2783 2729,2783 2729,3046 4099,3046 4099,306 4098,305
VBATT on Top Layer "VBATT_P" (solid, remove dead copper, pour order 16): 2745,300 2745,1300 2045,1300 2045,2795 2695,2795 2695,3045 1370,3045 1370,300
VBATT on Bottom Layer "VBATT_P" (solid, remove dead copper, pour order 33): 3584,3048 3584,2832 3885,2832 3894,2823 3898,2819 3898,2165 4105,2165 4100,2170 4100,3044
VBATT on Bottom Layer "VBATT_P" (solid, remove dead copper, pour order 31): 3598,310 3598,507 3612,521 3884,521 3884,1155 3889,1160 3899,1170 4096,1170 4096,309 4100,305
VBATT on Bottom Layer "VBATT_P" (solid, remove dead copper, pour order 29): 1367,1240 1578,1240 1578,2053 1367,2053
VBATT on Bottom Layer "VBATT_P" (solid, remove dead copper, pour order 27): 1949,310 1949,580 2626,580 2626,314 2635,305
GND on Bottom Layer "gnd mask" (solid, pour order 9): 2073,1396 2073,2751 2739,2751 2739,1396
GND on Bottom Layer "gnd mask" (solid, pour order 10): 2755,1407 2755,2751 3386,2751 3386,1407
GND on Bottom Layer "GND_P" (solid, remove dead copper, pour order 11): 2260,306.35 2260,1354 3425,1354 3425,2783 2260,2783 2260,3046 4099,3046 4099,306 4098,305
GND on Bottom Layer "GND_P" (solid, remove dead copper, pour order 15): 2260,300 2260,1555 2045,1555 2045,2780 2225,2780 2225,3045 1370,3045 1370,300

## Keep-outs
Keep-Out Layer:
  lines w1: 1352.7,295 4110,295 4110,3055 ; 1354.7,295 1354.7,3055 4110,3055 ; 4110,3052.3 4110,3055 ; 4110,3055 4110,3055

## Other copper
Multi-Layer:
  circle w19.68: c1474,2926 r78.74
  circle w19.68: c1475,421 r78.74
  circle w19.68: c3984,421 r78.74
  circle w19.68: c3984,2925 r78.74

## Silkscreen, mask and mechanical layers (free items; w line width, h text height)
Top Overlay:
  drawing of 983 lines, arcs and shapes, not listed
  text "-" at 3429,2828 h180 r180
  text "+" at 3678,2828 h180 r270
  text "-" at 1785,2820 h180 r180
  text "+" at 2034,2820 h180 r270
  text "GND" at 2698.99,2764 h40 r90
  text "GND" at 2898.99,2760 h40 r90
  text "+12V" at 2598.99,2759 h40 r90
  text "+5V" at 2798.99,2755 h40 r90
  text "-" at 1665,2225 h180 r90
  text "+" at 3787,2212 h180
  text "+" at 1665,1998 h180 r180
  text "-" at 3787,1965 h180 r270
  text "-" at 3870,1335 h180 r90
  text "+" at 1591,1313 h180
  text "+" at 3870,1088 h180 r180
  text "-" at 1591,1076 h180 r270
  text "+" at 2363,639 h180 r90
  text "-" at 3139,635 h180
  text "-" at 3406,620 h180 r180
  text "+" at 3663,620 h180 r270
  text "16V-26V" at 2526,613 h60
  text "-" at 1745,612 h180 r180
  text "+" at 2002,612 h180 r270
Bottom Overlay:
  text "-" at 3429,2828 h180 r180
  text "+" at 3678,2828 h180 r270
  text "-" at 1785,2820 h180 r180
  text "+" at 2034,2820 h180 r270
  text "-" at 1665,2225 h180 r90
  text "+" at 3787,2212 h180
  text "PDB HEX V1.0" at 1930,2000 h60 r90
  text "+" at 1665,1998 h180 r180
  text "-" at 3787,1965 h180 r270
  text "-" at 3870,1335 h180 r90
  text "+" at 1591,1313 h180
  text "Made In Venezuela" at 3580,1185 h60 r270
  text "+" at 3870,1088 h180 r180
  text "-" at 1591,1076 h180 r270
  text "by mecatronica@usb.ve" at 3315,840 h60
  text "+" at 2363,639 h180 r90
  text "-" at 3139,635 h180
  text "-" at 3406,620 h180 r180
  text "+" at 3663,620 h180 r270
  text "-" at 1745,612 h180 r180
  text "+" at 2002,612 h180 r270